# Altium PCB CC3200.PcbDoc
Units mil, origin at the board's own origin, x right, y up, seen from the top; angles counter-clockwise.
Board outline 6000 x 4000 mil, 2 copper layers (Top Layer, Bottom Layer); 140 components, 113 nets, 472 pads, 0 vias.
Unrouted connection lines stored in the file: 310.
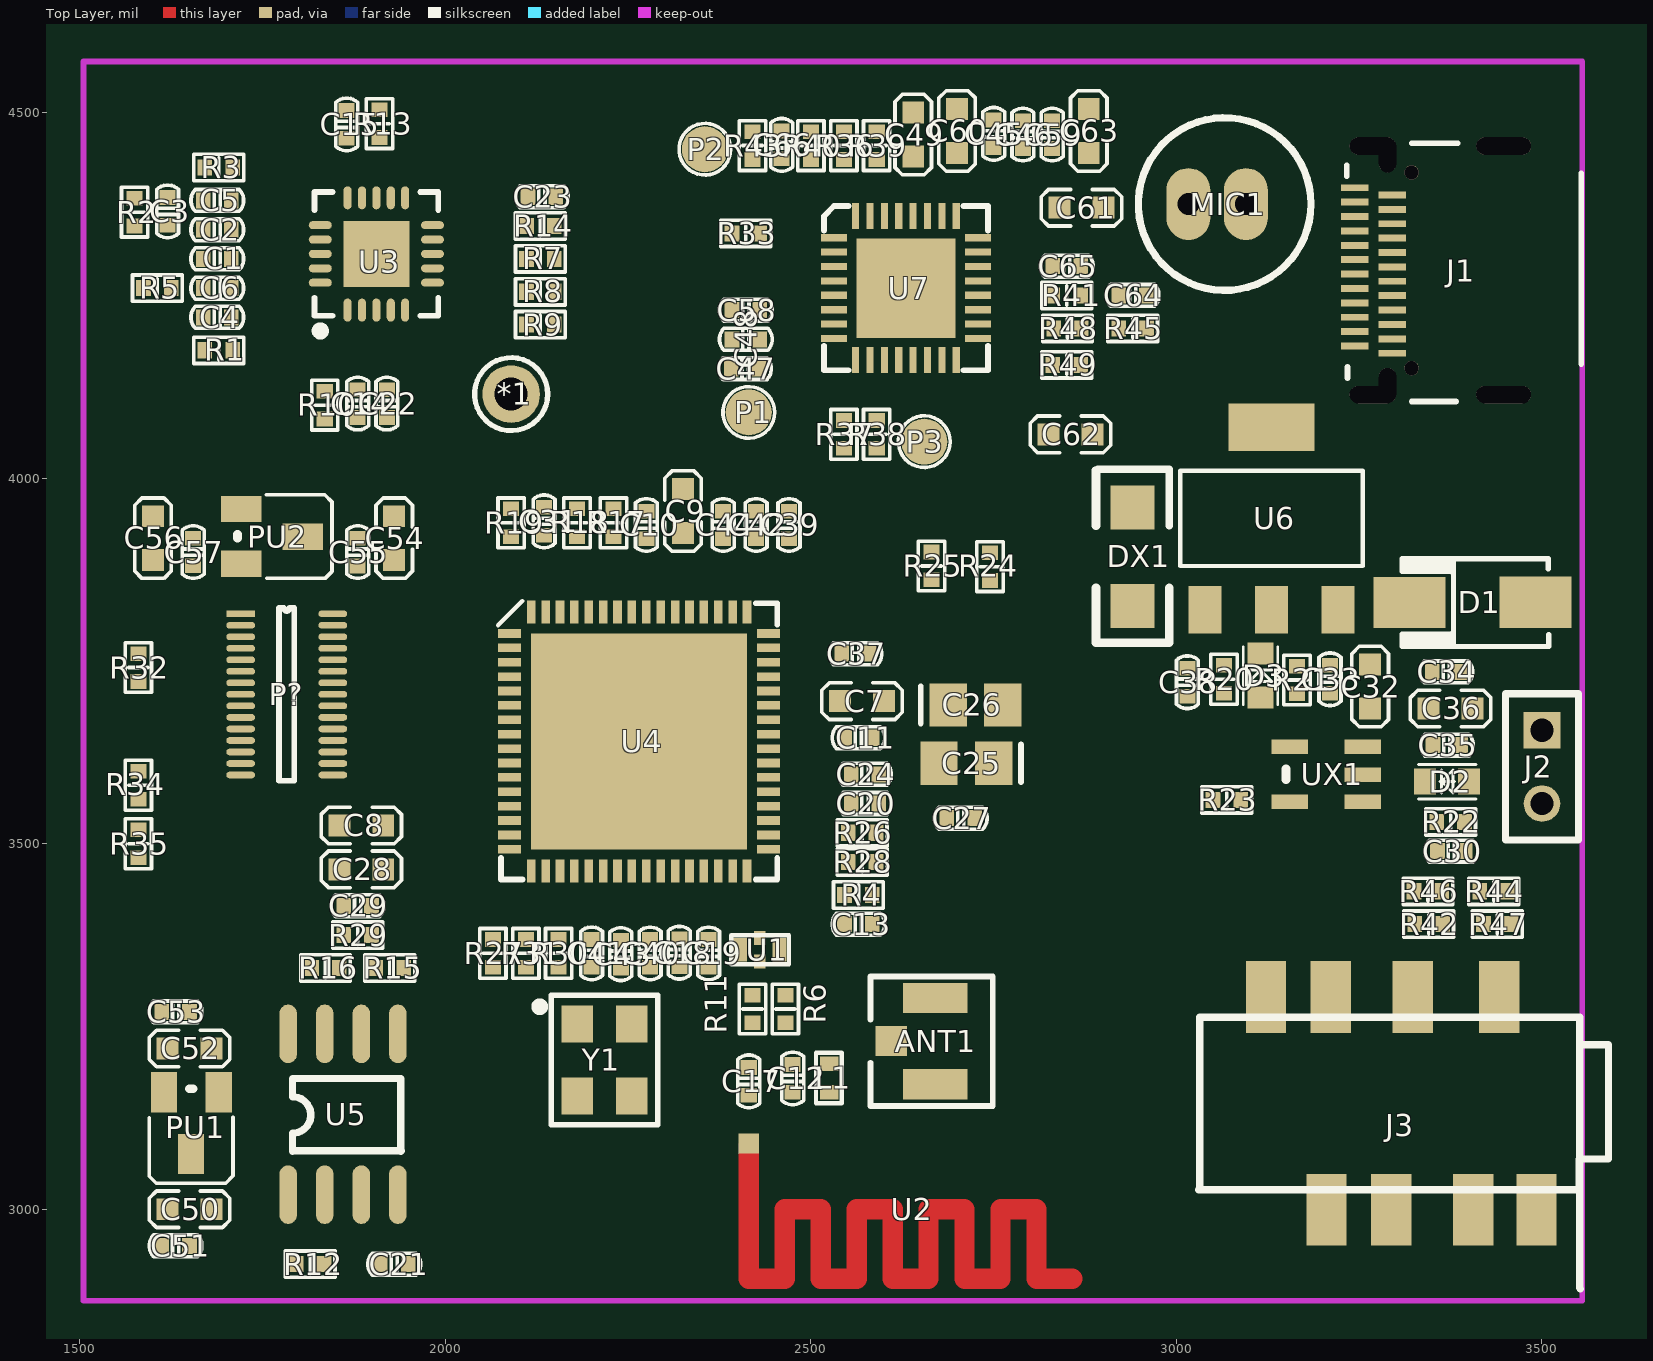
[diagram p0: Top Layer view]
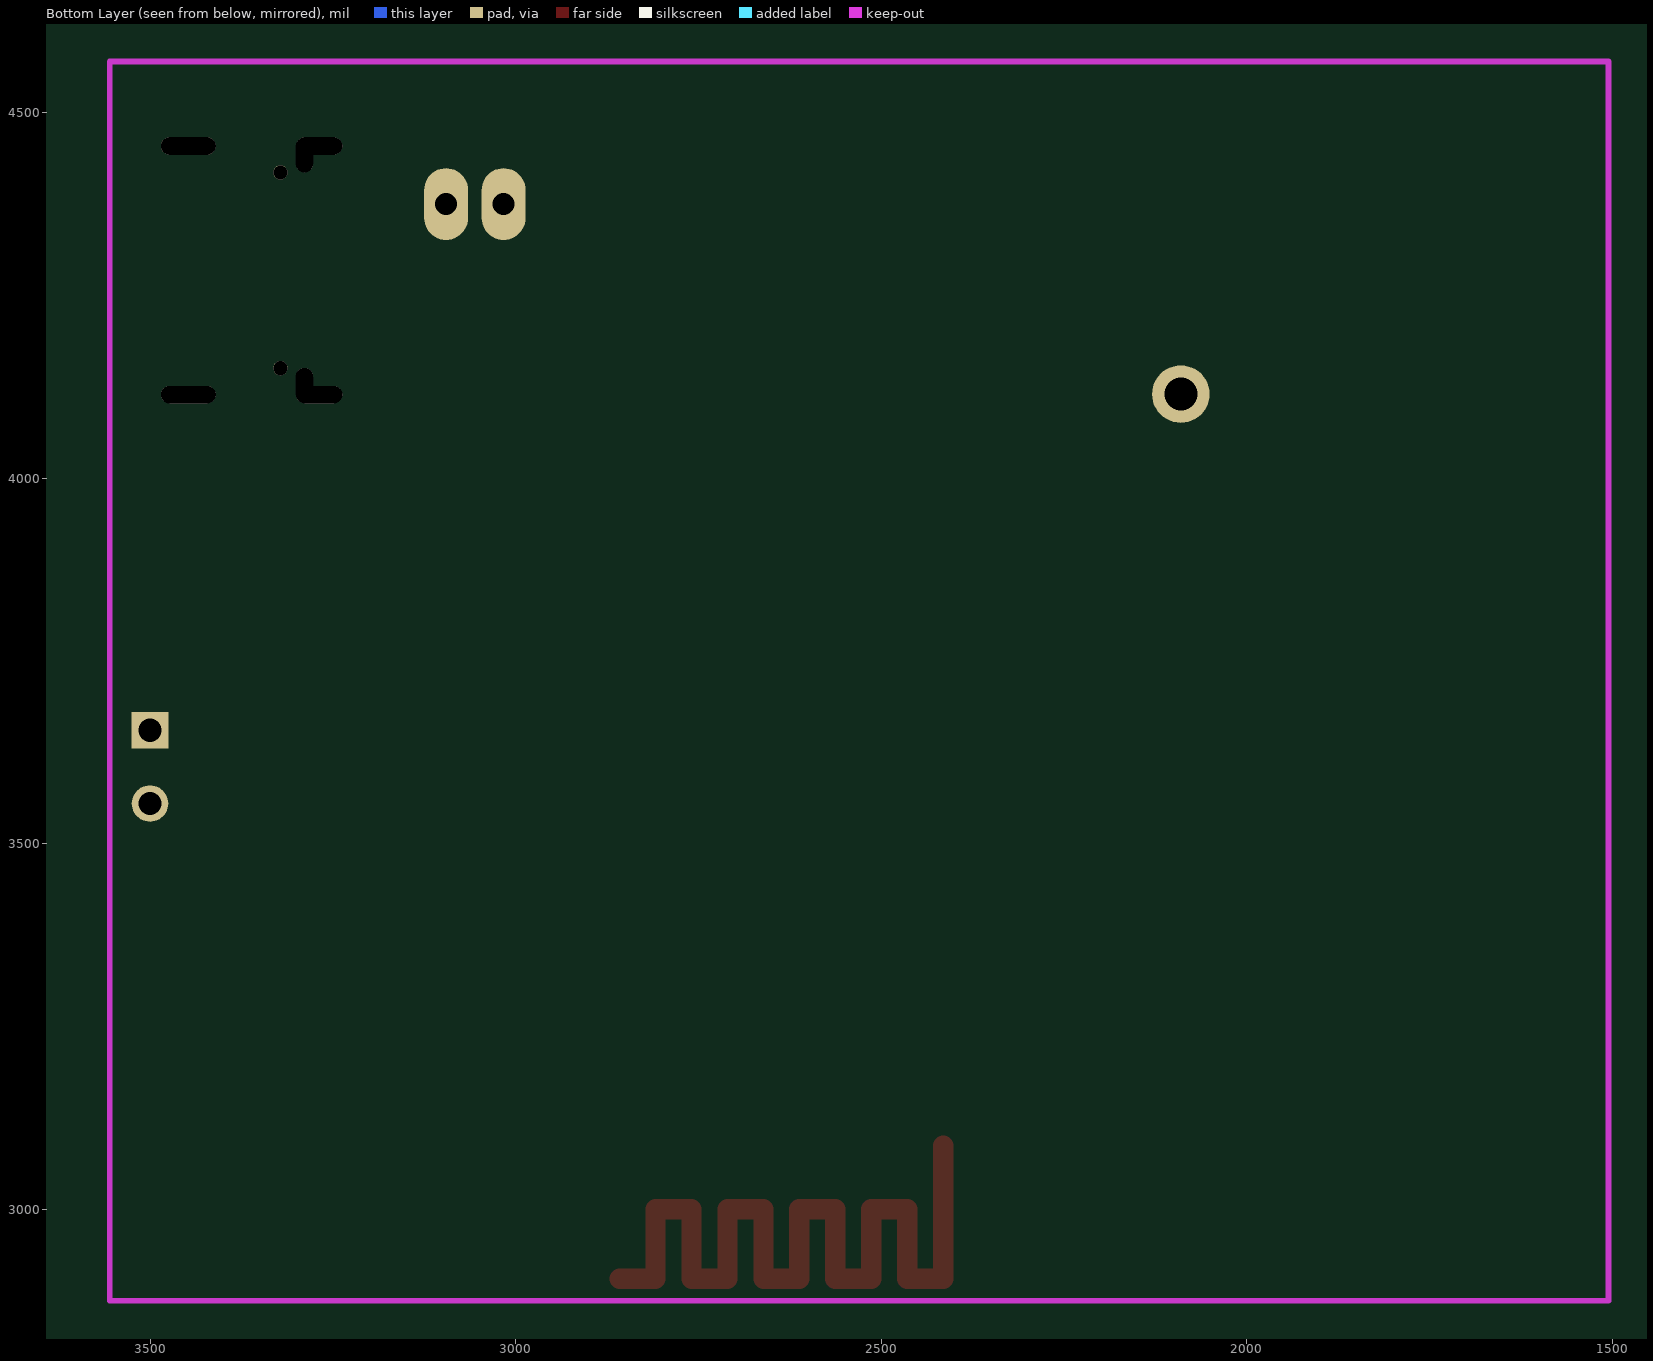
[diagram p1: Bottom Layer view, seen from below]

## Layer stack, top to bottom
Top Solder: solder mask 0.4, Solder Resist, Dk 3.5
Top Layer: signal copper 1.4
Dielectric 1: dielectric 12.6, FR-4, Dk 4.8
Bottom Layer: signal copper 1.4
Bottom Solder: solder mask 0.4, Solder Resist, Dk 3.5

## Board outline
1000,1000 7000,1000 7000,5000 1000,5000

## Design rules (kind name [scope] priority, off if disabled: settings)
Clearance [All] p1: gap=6
HoleToHoleClearance [All] p1: gap=8 allowstackedmicrovias=TRUE
MinimumSolderMaskSliver [All] p1: minsoldermaskwidth=0
PolygonConnect PolygonConnect_1 [IsVia] p1: connectstyle=Direct reliefconductorwidth=10 reliefentries=4 polygonreliefangle="90 Angle" airgapwidth=10
PolygonConnect [All] p2: connectstyle=Relief reliefconductorwidth=10 reliefentries=4 polygonreliefangle="90 Angle" airgapwidth=10
RoutingVias [All] p1: holewidth=20 width=10 viastyle="Through Hole" minholewidth=16 minwidth=8 maxholewidth=28 maxwidth=50
SilkToSilkClearance [All] p1: silktosilkclearance=0
SilkToSolderMaskClearance [IsPad] p1: minsilkscreentomaskgap=-1 clearancetoexposedcopper=TRUE
SolderMaskExpansion [All] p1: expansion=4
Width [All] p1: maxlimit=40 minlimit=8 preferedwidth=10 bottomlayer_minwidth=10 bottomlayer_maxwidth=10 minimp=50.000000 maximp=50.000000 favimp=50.000000
26 further rules are at their usual default settings.

## Components (designator, comment, footprint, x,y, rotation, side; value= is the part's Value field where it differs from the comment)
*1 "SIP1-2mm" SIP1-2mm 2090,4115 r0 top
ANT1 "IPEX" J-IPEX 2670.04,3170.94 r180 top
C1 "1uf" C0402 1687.94,4300 r0 top
C2 "100nf" C0402 1688.02,4340 r180 top
C3 "4.7NF" C0402 1620,4365 r270 top
C4 "4.7NF" C0402 1687.94,4220 r0 top
C5 "100nf" C0402 1688.02,4380 r180 top
C6 "100nf" C0402 1687.94,4260 r0 top
C7 "4.7uf" C0603 2540,3695 r0 top
C8 "4.7uf" C0603 1915,3525 r180 top
C9 "4.7uf" C0603 2325,3985 r270 top
C10 "100nf" C0402 2275,3935.98 r90 top
C11 "100nf" C0402 2565,3645 r0 top
C12 "101J10V" C0402 2475,3179 r270 top
C13 "100nf" C0402 2565,3390 r0 top
C14 "1uf" C0402 1880,4101.98 r90 top
C15 "100nf" C0402 1865,4484 r270 top
C17 "101J10V" C0402 2415,3175 r90 top
C18 "101J10V" C0402 2320,3351 r270 top
C19 "101J10V" C0402 2360,3350 r270 top
C20 "101J10V" C0402 2574,3555 r180 top
C21 "100nf" C0402 1930,2925 r0 top
C22 "1uf" C0402 1920,4101.98 r90 top
C23 "1uf" C0402 2132.06,4385 r180 top
C24 "101J10V" C0402 2574,3595 r0 top
C25 "226M50V" C0805 2712.6,3610 r180 top
C26 "226M50V" C0805 2725,3690 r0 top
C27 "100nf" C0402 2705,3535 r180 top
C28 "10uf" C0603 1915,3465 r180 top
C29 "100nf" C0402 1880,3415 r180 top
C30 "100nf" C0402 3376,3490 r180 top
C31 "100nf(NC)" C0402 2135,3941.06 r270 top
C32 "10uf" C0603 3265,3745 r270 top
C33 "100nf" C0402 3210,3725 r270 top
C34 "100nf" C0402 3369,3735 r0 top
C35 "100nf" C0402 3370,3635 r0 top
C36 "10uf" C0603 3345,3685 r0 top
C37 "101J10V" C0402 2561,3760 r0 top
C38 "100nf" C0402 3015,3721 r270 top
C39 "100nf" C0402 2470,3935.98 r90 top
C40 "100nf" C0402 2280,3350 r270 top
C41 "101J10V" C0402 2200,3350 r90 top
C42 "101J10V" C0402 2425,3935.98 r90 top
C43 "101J10V" C0402 2240,3349 r270 top
C44 "101J10V" C0402 2380,3935.98 r90 top
C45 "1uf" C0402 2750,4471 r90 top
C46 "100nf" C0402 2790,4470 r90 top
C47 "100nf" C0402 2410,4150 r180 top
C48 "1uf" C0402 2411,4190 r180 top
C49 "10uf" C0603 2640,4440 r90 top
C50 "10uf" C0603 1680,3000 r180 top
C51 "100nf" C0402 1631.06,2950 r180 top
C52 "10uf" C0603 1680,3220 r180 top
C53 "100nf" C0402 1631.06,3270 r180 top
C54 "10uf" C0603 1930,3887.94 r90 top
C55 "100nf" C0402 1880,3898.92 r90 top
C56 "10uf" C0603 1600,3887.94 r90 top
C57 "100nf" C0402 1655,3899 r270 top
C58 "1uf" C0402 2411,4230 r180 top
C59 "100nf" C0402 2830,4470 r90 top
C60 "47uf" C0603 2700,4445 r90 top
C61 "10uf" C0603 2900,4370 r180 top
C62 "10uf" C0603 2825,4060 r0 top
C63 "47uf" C0603 2880,4445 r90 top
C64 "1uf" C0402 2940,4250 r0 top
C65 "100nf" C0402 2850,4290 r180 top
C66 "100nf" C0402 2460,4456 r90 top
D1 "SS14" SMA 3405,3830 r180 top
D2 "发光二极管" 0603D 3370,3585 r90 top
D3 "发光二极管" 0603D 3115,3730 r0 top
DX1 "ZMM5V6ST" 1206A 2940,3960 r270 top
J1 "TYPEC-3KU024S" "MICRO -TYPE C" 3243.82,4176.06 r90 top
J2 "S2.54-2P" S2.54-2P 3500,3655 r270 top
J3 "SJ-2" PJ-393-8P 3110.67,3027.2 r0 top
L1 "INDUCTOR" 0402_SMALL 2537,3169 r90 top
MIC1 "CON2" MIC-6MM 3055.63,4375 r180 top
P1 "TEST" TP 2415,4090 r90 top
P2 "TEST" TP 2355,4450 r90 top
P3 "TEST" TP 2655,4050 r90 top
P? "MT9D111" MT9D111_A 1783.44,3704.25 r0 top
PU1 "芯片663K" SOT23 1690,3160 r180 top
PU2 "芯片663K" SOT23 1720.69,3957.94 r270 top
R1 "1K" R0402 1690,4175 r0 top
R2 "1K" R0402 1575,4364 r90 top
R3 "0R" R0402 1690,4425 r0 top
R4 "100k" R0402 2565,3430 r0 top
R5 "0R" R0402 1606,4260 r0 top
R6 "1KF" R0402 2465,3274 r270 top
R7 "NC" R0402 2130,4300 r0 top
R8 "NC" R0402 2130,4255 r0 top
R9 "NC" R0402 2130,4210 r180 top
R10 "100K" R0402 1835,4100 r90 top
R11 "1KF" R0402 2420,3274 r270 top
R12 "1KF" R0402 1815,2925 r0 top
R13 "0R" R0402 1910,4485 r270 top
R14 "NC" R0402 2130,4345 r180 top
R15 "1KF" R0402 1924,3330 r0 top
R16 "1KF" R0402 1836,3330 r0 top
R17 "0R" R0402 2230,3939 r90 top
R18 "0R" R0402 2180,3939 r90 top
R19 "0R(NC)" R0402 2090,3939 r270 top
R20 "1KF" R0402 3065,3725 r90 top
R21 "1KF" R0402 3165,3724 r90 top
R22 "12K" R0402 3375,3530 r180 top
R23 "1KF" R0402 3069,3560 r0 top
R24 "4.7K" R0402 2745,3879 r90 top
R25 "4.7K" R0402 2665,3880 r90 top
R26 "1KF" R0402 2570,3515 r180 top
R27 "0R" R0402 2065,3350 r270 top
R28 "1KF" R0402 2570,3475 r180 top
R29 "0R" R0402 1880,3375 r180 top
R30 "1KF" R0402 2155,3350 r90 top
R31 "1KF" R0402 2110,3350 r90 top
R32 "0R" R0402 1580,3741 r270 top
R33 "1KF" R0402 2411,4335 r0 top
R34 "0R" R0402 1580,3580 r90 top
R35 "0R" R0402 1580,3500 r270 top
R36 "1KF" R0402 2545,4455 r270 top
R37 "1KF" R0402 2545,4060 r270 top
R38 "1KF" R0402 2590,4060 r270 top
R39 "1KF" R0402 2590,4455 r270 top
R40 "10K" R0402 2500,4455 r90 top
R41 "0R  NC" R0402 2850,4250 r0 top
R42 "0R  NC" R0402 3345,3390 r180 top
R43 "0R" R0402 2420,4455 r270 top
R44 "0R" R0402 3434,3435 r0 top
R45 "0R  NC" R0402 2940,4205 r0 top
R46 "0R" R0402 3344,3435 r180 top
R47 "0R  NC" R0402 3439,3390 r180 top
R48 "0R  NC" R0402 2851,4205 r0 top
R49 "0R  NC" R0402 2850,4155 r0 top
U1 "DEA202450BT" DEA202450BT 2430,3355 r180 top
U2 "PCB_ANT1" BLE-ANT1 2415,3091.38 r0 top
U3 "TPA2012D2RTJ" TPA2012D2RTJ 1905.63,4306.77 r0 top
U4 "CC3200" CC3200 2265,3640 r0 top
U5 "W25Q80" SO-8S 1860,3130 r90 top
U6 "芯片LM1117-3.3V" SOT223S 3221,3820 r0 top
U7 "TLV320AIC3254" TLV320AIC3254 2630,4260 r90 top
UX1 "TP4054" SOT23-5 3205,3595 r180 top
Y1 "26MHz" Y-CPX-32GA-4P 2180.2,3253.43 r270 top

## Footprints (in the part's own frame and the unit in brackets; to place one, negate y for a bottom-side part, rotate by r counter-clockwise, add the part's x,y. Pads: shape width x height; smd on the part's side, far side on the other; paste and mask are expansions set on the pad)
0402_SMALL [mil]
  rect 19.68x25 smd: 1(-9,12) 2(30,12)
  silkscreen extent -24,-5 45,30
0603D [mil]
  rect 35.43x30 smd: A(0,-30) K(0,30)
  silkscreen extent -24,-40 24,39
1206A [mil]
  rect 60x60 smd: 1(0,0) 2(135,0)
  silkscreen extent -52,-51 185,50
BLE-ANT1 [mm]
  rect 0.7x0.7 smd: 1(0,-0.035)
  Top Layer lines w0.7: 0,-0.101 0,-2.321 ; 11.25,-4.734 10,-4.734 10,-2.321 8.75,-2.321 8.75,-4.734 7.5,-4.734 7.5,-2.321 6.25,-2.321 6.25,-4.734 5,-4.734 5,-2.321 3.75,-2.321 3.75,-4.734 2.5,-4.734 2.5,-2.321 1.25,-2.321 1.25,-4.734 0,-4.734 0,-2.418 ; 0,-2.418 0,-2.321 ; 0,-2.418 0,-2.321
C0402 [mil]
  rect 20x22 smd: 1(-19,0) 2(19,0)
  silkscreen extent -36,-15 36,15
C0603 [mil]
  rect 30x30 smd: 1(0,0) 2(60,0)
  silkscreen extent -25,-25 85,25, body extent -1,-15 61,16, height 12
C0805 [mm] "Chip Capacitor; Body 2.0 x 1.2 mm (LxW typ)"
  rect 1.3x1.5 smd: 1(-0.95,0) 2(0.95,0)
  silkscreen extent -1.9,-0.65 -1.9,0.65
CC3200 [mm]
  rect 0.8x0.3 smd: 1(-4.5,3.75) 2(-4.5,3.25) 3(-4.5,2.75) 4(-4.5,2.25) 5(-4.5,1.75) 6(-4.5,1.25) 7(-4.5,0.75) 8(-4.5,0.25) 9(-4.5,-0.25) 10(-4.5,-0.75) 11(-4.5,-1.25) 12(-4.5,-1.75) 13(-4.5,-2.25) 14(-4.5,-2.75) 15(-4.5,-3.25) 16(-4.5,-3.75) 33(4.5,-3.75) 34(4.5,-3.25) 35(4.5,-2.75) 36(4.5,-2.25) 37(4.5,-1.75) 38(4.5,-1.25) 39(4.5,-0.75) 40(4.5,-0.25) 41(4.5,0.25) 42(4.5,0.75) 43(4.5,1.25) 44(4.5,1.75) 45(4.5,2.25) 46(4.5,2.75) 47(4.5,3.25) 48(4.5,3.75)
  rect 0.3x0.8 smd: 17(-3.75,-4.5) 18(-3.25,-4.5) 19(-2.75,-4.5) 20(-2.25,-4.5) 21(-1.75,-4.5) 22(-1.25,-4.5) 23(-0.75,-4.5) 24(-0.25,-4.5) 25(0.25,-4.5) 26(0.75,-4.5) 27(1.25,-4.5) 28(1.75,-4.5) 29(2.25,-4.5) 30(2.75,-4.5) 31(3.25,-4.5) 32(3.75,-4.5) 49(3.75,4.5) 50(3.25,4.5) 51(2.75,4.5) 52(2.25,4.5) 53(1.75,4.5) 54(1.25,4.5) 55(0.75,4.5) 56(0.25,4.5) 57(-0.25,4.5) 58(-0.75,4.5) 59(-1.25,4.5) 60(-1.75,4.5) 61(-2.25,4.5) 62(-2.75,4.5) 63(-3.25,4.5) 64(-3.75,4.5)
  rect 7.5x7.5 smd: 65(0,0)
  silkscreen extent -4.9,-4.8 4.8,4.88
DEA202450BT [mm]
  rect 0.4x0.5 smd: 1(0,-0.406) 3(0,0.406)
  rect 0.5x0.8 smd: 2(0.686,0) 4(-0.686,0)
  silkscreen extent -1.02,-0.51 0.99,0.51
J-IPEX [mm]
  rect 1.1x1.05 smd: 1(1.525,-1.5)
  rect 2.25x1.05 smd: 2(0,0) 3(0,-3)
  Top Layer pour cut-out: -1.125,-0.525 -1.125,-2.475 0.975,-2.475 0.975,-0.525
  silkscreen extent -2,-3.75 2.25,0.75
MIC-6MM [mil]
  oval 60x98.43 hole 30: 1(-39.37,0) 2(39.37,0)
  silkscreen extent -128,-118 108,118
"MICRO -TYPE C" [mm]
  oval 0.6x1.6 hole 0.6 slot 1.6 at 90 deg: 25(-1.57,-0.625) 27(7.07,-0.625)
  oval 1.2x0.6 hole 0.6 slot 1.2 at 0 deg: 26(-1.245,-1.143) 28(6.756,-1.143)
  oval 0.6x1.9 hole 0.6 slot 1.9 at 90 deg: 29(-1.57,-5.175) 30(7.07,-5.175)
  round 0.5 hole 0.5: 31(-0.65,-1.975) 32(6.15,-1.975)
  rect 0.24x0.95 smd: A1(0.12,0) A2(0.62,0) A3(1.12,0) A4(1.62,0) A5(2.12,0) A6(2.62,0) A7(3.12,0) A8(3.62,0) A9(4.12,0) A10(4.62,0) A11(5.12,0) A12(5.62,0) B1(-0.13,-1.3) B2(0.37,-1.3) B3(0.87,-1.3) B4(1.37,-1.3) B5(1.87,-1.3) B6(2.37,-1.3) B7(2.87,-1.3) B8(3.37,-1.3) B9(3.87,-1.3) B10(4.37,-1.3) B11(4.87,-1.3) B12(5.37,-1.3)
  silkscreen extent -1.8,-7.87 7.16,0.28
MT9D111_A [mm]
  rect 1x0.23 smd: 1(-1.611,2.8)
  oval 1x0.23 smd: 2(-1.611,2.4) 3(-1.611,2) 4(-1.611,1.6) 5(-1.611,1.2) 6(-1.611,0.8) 7(-1.611,0.4) 8(-1.611,0) 9(-1.611,-0.4) 10(-1.611,-0.8) 11(-1.611,-1.2) 12(-1.611,-1.6) 13(-1.611,-2) 14(-1.611,-2.4) 15(-1.611,-2.8) 16(1.589,-2.8) 17(1.589,-2.4) 18(1.589,-2) 19(1.589,-1.6) 20(1.589,-1.2) 21(1.589,-0.8) 22(1.589,-0.4) 23(1.589,0) 24(1.589,0.4) 25(1.589,0.8) 26(1.589,1.2) 27(1.589,1.6) 28(1.589,2) 29(1.589,2.4) 30(1.589,2.8)
  silkscreen extent -0.28,-3 0.25,3
PJ-393-8P [mm]
  rect 1.4x2.5 smd: 1(0.3,6.692) 1(2.4,-0.708) 2(2.55,6.692) 2(4.65,-0.708) 3(5.4,6.692) 3(7.5,-0.708) 4(8.4,6.692) 4(9.7,-0.708)
  round 1.3 on Keep-Out: 5(2,2.992) 5(9,2.992)
  silkscreen extent -2.03,-3.46 12.2,5.99
R0402 [mil]
  rect 20x22 smd: 1(-19,0) 2(19,0)
  silkscreen extent -34,-18 34,18
S2.54-2P [mil]
  rect 50x50 hole 32: 1(0,0)
  round 50 hole 32: 2(100,0)
  silkscreen extent -50,-50 150,50, body extent -50,-50 150,50, height 315
SIP1-2mm [mm]
  round 2 hole 1.143: 1(0,0)
  silkscreen extent -1.27,-1.27 1.27,1.27
SMA [mil]
  rect 98.42x70 smd: A(-86.34,-0.23) K(86.34,0.23)
  silkscreen extent -104,-60 97,60, body extent -108,-55 108,55, height 91
SO-8S [mil]
  oval 80x24 smd: 1(-110,75) 2(-110,25) 3(-110,-25) 4(-110,-75) 5(110,-75) 6(110,-25) 7(110,25) 8(110,75)
  silkscreen extent -51,-80 49,69
SOT23 [mil]
  rect 36x55 smd: 1(0,0) 2(75,0) 3(38,84.31)
  silkscreen extent -20,-5 95,124
SOT23-5 [mil]
  rect 50x20 smd: 1(-50,37.5) 2(-50,0.5) 3(-50,-37.5) 4(50,-37.5) 5(50,37.5)
  silkscreen extent 55,-7 55,8
SOT223S [mil]
  rect 45x65 smd: 1(-182,0) 2(-91,0) 3(0,0)
  rect 118x65 smd: 4(-91,250)
  silkscreen extent -216,60 34,190
TLV320AIC3254 [mm]
  rect 0.25x0.9 smd: 1(1.75,2.5) 2(1.25,2.5) 3(0.75,2.5) 4(0.25,2.5) 5(-0.25,2.5) 6(-0.75,2.5) 7(-1.25,2.5) 8(-1.75,2.5) 17(-1.75,-2.5) 18(-1.25,-2.5) 19(-0.75,-2.5) 20(-0.25,-2.5) 21(0.25,-2.5) 22(0.75,-2.5) 23(1.25,-2.5) 24(1.75,-2.5)
  rect 0.9x0.25 smd: 9(-2.5,1.75) 10(-2.5,1.25) 11(-2.5,0.75) 12(-2.5,0.25) 13(-2.5,-0.25) 14(-2.5,-0.75) 15(-2.5,-1.25) 16(-2.5,-1.75) 25(2.5,-1.75) 26(2.5,-1.25) 27(2.5,-0.75) 28(2.5,-0.25) 29(2.5,0.25) 30(2.5,0.75) 31(2.5,1.25) 32(2.5,1.75)
  rect 3.45x3.45 smd: 33(0,0)
  silkscreen extent -2.85,-2.85 2.85,2.85
TP [mm]
  round 1.6 smd: 1(0,0)
  silkscreen extent -0.9,-0.9 0.9,0.89
TPA2012D2RTJ [mm]
  oval 0.28x0.8 smd: 1(-1,-1.95) 2(-0.5,-1.95) 3(0,-1.95) 4(0.5,-1.95) 5(1,-1.95) 11(1,1.95) 12(0.5,1.95) 13(0,1.95) 14(-0.5,1.95) 15(-1,1.95)
  oval 0.8x0.28 smd: 6(1.95,-1) 7(1.95,-0.5) 8(1.95,0) 9(1.95,0.5) 10(1.95,1) 16(-1.95,1) 17(-1.95,0.5) 18(-1.95,0) 19(-1.95,-0.5) 20(-1.95,-1)
  rect 2.3x2.3 smd: 21(0,0)
  silkscreen extent -2.15,-2.82 2.15,2.15
Y-CPX-32GA-4P [mm]
  rect 1.3x1.1 smd: 1(0,0) 2(2.5,0) 3(2.5,1.9) 4(0,1.9)
  silkscreen extent -1,-1.44 3.5,2.8

## Part data
ANT1: library part J-IPEX
C1 C2 C3 C4 C5 C6 C10 C11 C12 C13 C14 C15 C17 C18 C19 C20 C21 C22 C23 C24 C27 C29 C30 C31 C33 C34 C35 C37 C38 C39 C40 C41 C42 C43 C44 C45 C46 C47 C48 C51 C53 C55 C57 C58 C59 C64 C65 C66: library part C0402X7R-101J10V, "贴片电容-陶瓷"
C7 C8 C9: library part C0603X7R-475K16V, "贴片电容-陶瓷"
C25 C26: library part C0805Y5V-226M50V, "贴片电容-陶瓷"
C28 C32 C36 C49 C50 C52 C54 C56 C60 C61 C62 C63: library part C0603X7R-106K50V, "贴片电容-陶瓷"
D1: library part "SS14 DO-214", "二极管"
DX1: library part "D Zener", "Zener Diode"
J1: "DIP Switch"
J2: library part J-S2.54-2P, "单排排针-直针"
MIC1: "Connector"
P1 P2 P3: "BNC Elbow Connector"
PU1 PU2: library part 663K
R1 R2 R3 R4 R5 R6 R7 R8 R9 R10 R11 R12 R13 R14 R15 R16 R17 R18 R19 R20 R21 R22 R23 R24 R25 R26 R27 R28 R29 R30 R31 R32 R33 R34 R35 R36 R37 R38 R39 R40 R41 R42 R43 R44 R45 R46 R47 R48 R49: library part R0402-1KF, "贴片电阻-通用"
U6: library part AS1117
Y1: library part YC-26MHz, "晶振-贴片无源"

## Nets (pads, with @x,y where several pads share a name; then routed paths per layer and width w, separated by ;. In a path a pad name is that pad's centre, name@x,y a point inside that pad or via, vN(x,y) a via of type N, cw(c..) or ccw(c..) an arc to the next point about the centre after c; other vN are vias at no path point)
AA_LOL: R2.2 U7.22
AA_LOR: R1.1 U7.23
AVDD: C61.2 R7.2 U7.24
BCLK_IN: R33.1 U4.53 U7.2
CONN_SCL: R29.2 R37.1 U7.9
CONN_SDA: R27.2 R38.1 U7.10
D2: P?.27 U4.61
D3: P?.26 U4.60
D4: P?.25 U4.59
D5: P?.24 U4.58
D6: P?.23 U4.5
D7: P?.22 U4.6
D8: P?.21 U4.7
D9: P?.20 U4.8
DIN: U4.64 U7.4
DOUT: U4.50 U7.5
FSYNC_IN: U4.63 U7.3
GND: ANT1.2 ANT1.3 C7.2 C8.2 C9.1 C10.2 C11.2 C13.2 C14.1 C15.1 C17.2 C18.2 C19.2 C20.1 C21.2 C22.1 C23.1 C24.2 C25.2 C26.1 C27.2 C28.2 C29.2 C30.2 C31.2 C32.2 C33.2 C34.2 C35.2 C36.2 C37.2 C38.2 C39.2 C40.2 C41.1 C42.1 C43.2 C44.1 C45.2 C46.2 C47.2 C48.2 C49.2 C50.1 C51.1 C52.1 C53.1 C54.1 C55.1 C56.1 C57.1 C58.2 C59.2 C61.1 C62.2 C65.1 C66.2 D3.K DX1.1 J1.A1 J1.A12 J1.B1 J1.B12 J2.2 L1.2 P?.16 P?.30 PU1.1 PU2.1 R3.2 R5.1 R9.1 R10.1 R15.1 R16.1 R23.1 R26.1 R28.1 R30.1 R31.1 R39.1 R44.2 R47.2 R49.2 U1.2 U1.4 U3.4 U3.12 U3.18 U3.21 U4.65 U5.4 U6.1 U7.7 U7.12 U7.17 U7.28 U7.33 UX1.2 Y1.2 Y1.4
HD: P?.10 U4.4
JACK_MONO_IN: R42.2 R46.2
JACK_N1: J3.3 R42.1 R44.1
JACK_N2: J3.4 R46.1 R47.1
MCLK: P?.7 U4.2
MICBIAS: R45.1 U7.19
MOTOR_B+: U4.1 U4.15 U4.18
Net*1_1: *1.1 R8.2
NetANT1_1: ANT1.1 C12.2 L1.1
NetC1_1: C1.1 C4.2 R1.2
NetC1_2: C1.2 U3.19
NetC2_1: C2.1 U3.17
NetC2_2: C2.2 C3.2 R2.1
NetC3_1: C3.1 C5.2 R3.1
NetC4_1: C4.1 C6.1 R5.2
NetC5_1: C5.1 U3.16
NetC6_2: C6.2 U3.20
NetC12_1: C12.1 R6.2
NetC17_1: C17.1 U2.1
NetC18_1: C18.1 C19.1 C20.2 C24.1 U4.25 U4.36 U4.48
NetC22_2: C22.2 C23.2 R13.2 R14.2 U3.3 U3.9 U3.13
NetC25_1: C25.1 C26.2 C27.1 U4.33 U4.42
NetC28_1: C28.1 C29.1 C30.1 U4.9 U4.56
NetC37_1: C37.1 U4.47
NetC39_1: C39.1 U4.49
NetC40_1: C40.1 U4.24
NetC41_2: C41.2 U4.22 Y1.1
NetC42_2: C42.2 U4.52
NetC43_1: C43.1 U4.23 Y1.3
NetC44_2: C44.2 U4.51
NetC49_1: C49.1 U7.29
NetC60_2: C60.2 J3.1
NetC62_1: C62.1 U7.18
NetC63_2: C63.2 J3.2
NetC64_1: C64.1 R41.2
NetC64_2: C64.2 MIC1.1 R45.2
NetD1_A: D1.A J2.1
NetD2_A: D2.A R22.1
NetD3_A: D3.A R21.1
NetL2_1: R11.2
NetL3_2: U4.38
NetL4_1: U4.41
NetL4_2: U4.40
NetL5_2: U4.43
NetMIC1_2: MIC1.2 R48.2
NetP1_1: P1.1 U7.8
NetP2_1: P2.1 U7.32
NetP3_1: P3.1 U7.11
NetP?_6: P?.6 R32.2
NetP?_13: P?.13 R34.2
NetP?_14: P?.14 R35.2
NetR6_1: R6.1 R11.1 U1.3
NetR7_1: R7.1 R8.1 R9.2 U3.7 U3.8
NetR12_1: R12.1 U4.14 U5.1
NetR15_2: R15.2 U4.12 U5.5
NetR16_2: R16.2 U4.11 U5.6
NetR20_1: R20.1 R22.2 UX1.4
NetR23_2: R23.2 UX1.5
NetR26_2: R26.2 U4.35
NetR28_2: R28.2 U4.34
NetR30_2: R30.2 U4.21
NetR31_2: R31.2 U4.19
NetR33_2: R33.2 U7.1
NetR36_2: R36.2 R39.2 U7.30
NetU1_1: U1.1 U4.31
NetU4_13: U4.13 U5.2
NRESET: C13.1 R4.1 R43.1 U4.32
PCLK: P?.5 R17.1 U4.55
PCLK_3V3: R17.2
PWDN: P?.4 U4.57
RESET: P?.8 R18.1 U4.62
RESET_3V3: C31.1 R18.2 R19.1
RESET_OUT: C66.1 R40.1 R43.2 U7.31
SCK: R24.2
SDA: R25.2
SJ_HPL: C63.1 U7.25
SJ_HPR: C60.1 U7.27
SJ_IN1L: U7.13
SJ_IN1R: U7.14
SJ_IN2L: U7.15
SJ_IN2R: U7.16
SJ_IN3L: R48.1 R49.1 U7.20
SJ_IN3R: C65.2 R41.1 U7.21
SS11: D2.K UX1.1
TD0: P?.2 R27.1 U4.17
TD1: P?.3 R29.1 U4.16
VBAT: C21.1 C34.1 C35.1 C36.1 D1.K U5.3 U5.7 U5.8 U6.3 UX1.3
VCC: C7.1 C8.1 C9.2 C10.1 C11.1 C14.2 C15.2 C32.1 C33.1 C45.1 C46.1 C47.1 C48.1 C50.2 C51.2 C54.2 C55.2 C58.1 C59.1 PU1.3 PU2.3 R4.2 R10.2 R12.2 R19.2 R21.2 R24.1 R25.1 R36.1 R37.2 R38.2 R40.2 U3.1 U3.15 U4.10 U4.37 U4.39 U4.44 U4.54 U6.2 U7.6 U7.26
"VCC +5V": C38.1 DX1.2 J1.A4 J1.A9 J1.B4 J1.B9 R20.2
VCC_1V8: C56.2 C57.2 PU2.2 R32.1
VCC_2.8V: P?.15 R34.1 R35.1
VCC_2V8: C52.2 C53.2 PU1.2
VCC_3V3: R13.1
VCC_5V_MCU: R14.1
VD: P?.9 U4.3
pads on no net: J1.25 J1.26 J1.27 J1.28 J1.29 J1.30 J1.31 J1.32 J1.A2 J1.A3 J1.A5 J1.A6 J1.A7 J1.A8 J1.A10 J1.A11 J1.B2 J1.B3 J1.B5 J1.B6 J1.B7 J1.B8 J1.B10 J1.B11 J3.5 P?.1 P?.11 P?.12 P?.17 P?.18 P?.19 P?.28 P?.29 U3.2 U3.5 U3.6 U3.10 U3.11 U3.14 U4.20 U4.26 U4.27 U4.28 U4.29 U4.30 U4.45 U4.46 U6.4

## Keep-outs
Keep-Out Layer:
  lines w7.87: 1505,2875 1505,4570 3555,4570 3555,2875 1505,2875